# Altium PCB PCB1.PcbDoc
Units mm, origin at the board's own origin, x right, y up, seen from the top; angles counter-clockwise.
Board outline 30.4 x 31.22 mm, 2 copper layers (Top Layer, Bottom Layer); 47 components, 33 nets, 158 pads, 154 vias.
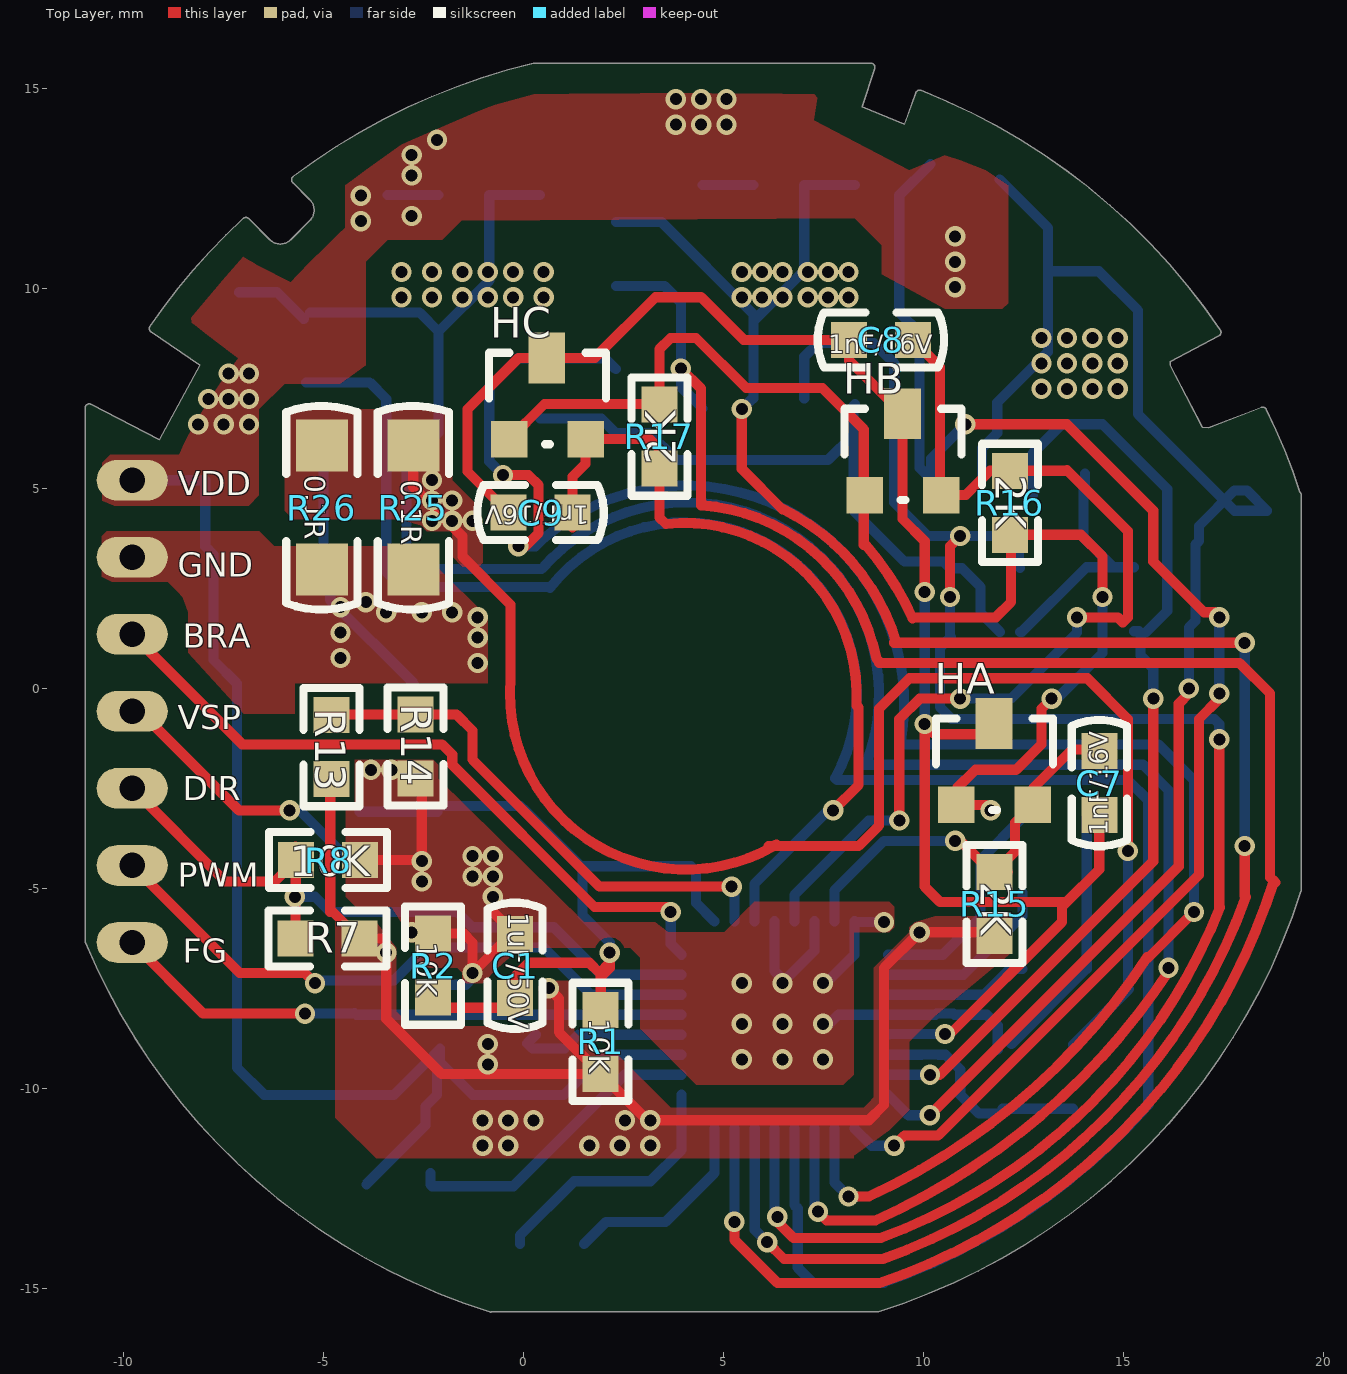
[diagram p0: Top Layer view]
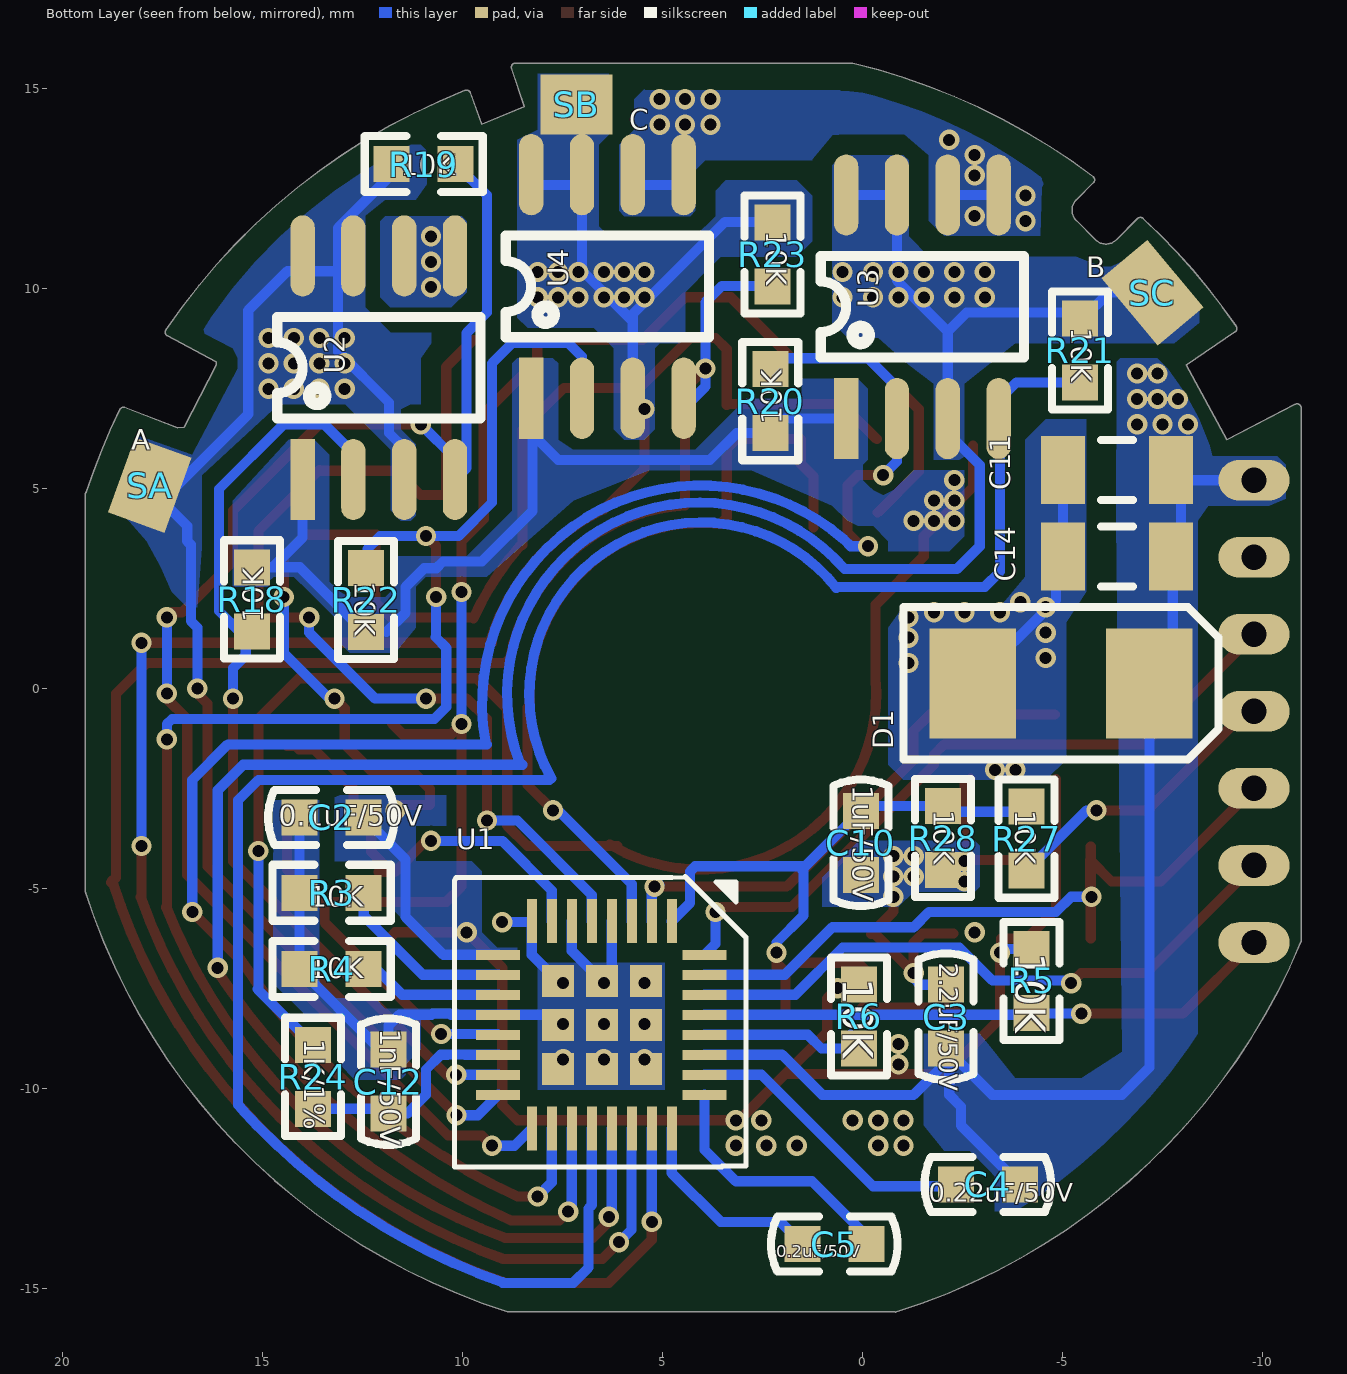
[diagram p1: Bottom Layer view, seen from below]

## Layer stack, top to bottom
Top Solder: solder mask 0.0102, Solder Resist, Dk 3.5
Top Layer: signal copper 0.0356
Dielectric 1: dielectric 0.32, FR-4, Dk 4.8
Bottom Layer: signal copper 0.0356
Bottom Solder: solder mask 0.0102, Solder Resist, Dk 3.5

## Board outline
-10.95,-6.341 cw(c-10.855,-6.302) -10.957,-6.302 -10.957,7.013 cw(c-10.855,7.013) -10.808,7.104 -10.809,7.104 -10.808,7.104 -9.097,6.22 -8.084,8.083 -9.308,8.915 cw(c-9.251,8.999) -9.335,9.057 cw(c4.013,-0.127) -7.007,11.75 cw(c-6.938,11.675) -6.86,11.741 -6.338,11.219 ccw(c-6.41,11.147) -6.338,11.219 ccw(c-6.077,11.479) -5.817,11.219 -5.338,11.698 ccw(c-5.266,11.626) -5.338,11.698 ccw(c-5.598,11.958) -5.23,11.958 ccw(c-5.598,11.958) -5.338,12.218 cw(c-5.266,12.291) -5.338,12.219 -5.338,12.218 -5.765,12.646 cw(c-5.693,12.718) -5.755,12.799 cw(c4.013,-0.127) 0.255,15.633 cw(c0.279,15.534) 0.298,15.634 8.687,15.634 cw(c8.687,15.532) 8.789,15.532 cw(c8.687,15.532) 8.784,15.5 8.47,14.548 9.529,14.106 9.809,14.89 cw(c9.905,14.856) 9.943,14.951 cw(c4.013,-0.127) 17.425,8.964 cw(c17.34,8.906) 17.442,8.906 cw(c17.34,8.906) 17.388,8.816 16.167,8.168 16.167,8.089 16.969,6.535 17.131,6.517 18.447,7.025 cw(c18.484,6.93) 18.576,6.975 cw(c4.013,-0.127) 19.413,4.908 cw(c19.343,4.834) 19.445,4.834 19.445,-5.047 ccw(c19.343,-5.047) 19.445,-5.045 19.445,-5.047 cw(c19.343,-5.047) 19.44,-5.078 cw(c4.013,-0.127) 8.881,-15.58 cw(c8.85,-15.483) 8.85,-15.585 -0.789,-15.585 cw(c-0.814,-15.486) -0.844,-15.584 cw(c4.013,-0.127)

## Design rules (kind name [scope] priority, off if disabled: settings)
Clearance [All] p1: gap=0.127
PolygonConnect [All] p1: connectstyle=Direct reliefconductorwidth=0.254 reliefentries=4 polygonreliefangle="90 Angle" airgapwidth=0.254
RoutingVias [All] p1: holewidth=0.711 width=1.27 viastyle="Through Hole" minholewidth=0.711 minwidth=1.27 maxholewidth=0.711 maxwidth=1.27
SilkToSilkClearance [All] p1: silktosilkclearance=0.051
SolderMaskExpansion [All] p1: expansion=0.102
Width [All] p1: maxlimit=0.254 minlimit=0.254 preferedwidth=0.254
29 further rules are at their usual default settings.

## Components (designator, comment, footprint, x,y, rotation, side; value= is the part's Value field where it differs from the comment)
C1 "1uF/50V" C0603 -3.302,-7.239 r180 top
C2 "0.1uF/50V" C0603 13.589,-0.127 r90 bottom
C3 "2.2uF/50V" C0603 1.016,-8.509 r0 bottom
C4 "0.22uF/50V" C0603 -3.429,-15.494 r270 bottom
C5 "0.2uF/50V" C0603 1.016,-10.795 r90 bottom
C7 "1nF/16V" C0603 11.303,-2.667 r180 top
C8 "1nF/16V" C0603 8.636,11.811 r90 top
C9 "1nF/16V" C0603 0.127,7.493 r90 top
C10 "1uF/50V" C0603 -3.048,-3.556 r180 bottom
C11 "22uF/25V" C1206 -6.35,5.461 r180 bottom
C12 "1nF/50V" C0603 8.763,-9.525 r180 bottom
C14 "22uF/25V" C1206 -6.35,3.302 r180 bottom
D1 "24V/Zener" SMB -4.953,0.127 r180 bottom
HA "HALL_SOT23-3" SOT-23 15.113,-2.54 r0 top locked
HB "HALL_SOT23-3" SOT-23 12.827,5.207 r0 top locked
HC "HALL_SOT23-3" SOT-23 3.937,6.604 r0 top locked
R1 "10K" R0603 0.254,-10.287 r180 top
R2 "10K" R0603 -3.937,-8.382 r180 top
R3 "10K" R0603 14.732,-3.429 r90 bottom
R4 "10K" R0603 14.732,-5.334 r90 bottom
R5 "10K" R0603 -2.54,-8.763 r0 bottom
R6 "10K" R0603 1.778,-9.652 r0 bottom
R7 "" R0603 -6.35,-4.572 r90 top
R8 "10K" R0603 -3.429,-5.969 r270 top
R13 "" R0603 -6.477,-2.921 r180 top
R14 "" R0603 -1.016,0 r0 top
R15 "2K" R0603 13.462,-3.937 r0 top
R16 "2K" R0603 13.843,6.096 r0 top
R17 "2K" R0603 5.08,7.747 r0 top
R18 "10K" R0603 13.589,3.683 r180 bottom
R19 "10K" R0603 9.525,11.43 r270 bottom
R20 "10K" R0603 0.635,8.636 r180 bottom
R21 "10K" R0603 -7.112,9.906 r180 bottom
R22 "10K" R0603 14.097,0.762 r0 bottom
R23 "10K" R0603 3.937,9.398 r0 bottom
R24 "1K/1%" R0603 12.065,-8.255 r180 bottom
R25 "0.1R" R1206 -0.508,4.445 r0 top
R26 "0.1R" R1206 -2.794,4.445 r0 top
R27 "10K" R0603 -2.413,-5.207 r0 bottom
R28 "10K" R0603 -3.683,-2.286 r180 bottom
SA "" cp1#1 23.749,7.239 r20 top
SB "" cp1#2 13.462,14.605 r0 top
SC "" cp1#3 -2.413,5.842 r320 top
U1 "SDC9270_QFN32" "QFN32 (5*5)" 6.604,-3.175 r270 bottom
U2 "MOS" SOP-8 17.907,7.874 r0 bottom
U3 "MOS" SOP-8 4.318,9.398 r0 bottom
U4 "MOS" SOP-8 12.192,9.906 r0 bottom

## Footprints (in the part's own frame and the unit in brackets; to place one, negate y for a bottom-side part, rotate by r counter-clockwise, add the part's x,y. Pads: shape width x height; smd on the part's side, far side on the other; paste and mask are expansions set on the pad)
C0603 [mm]
  rect 0.9x0.9 smd: 1(-3.096,0.496) 2(-3.096,-1.104)
  silkscreen extent -3.78,-1.88 -2.41,1.28
C1206 [mm] "Chip Capacitor, Body 3.2x1.6mm, IPC High Density"
  rect 1.1x1.7 smd: 1(-1.35,0) 2(1.35,0)
  silkscreen extent -0.4,-0.75 0.4,0.75, body extent -1.7,-0.9 1.7,0.9, height 1.3
cp1#1 [mm]
  rect 1.5x2 smd far side: 1(-6.3,0)
cp1#2 [mm]
  rect 1.8x1.5 smd far side: 1(-6.3,0)
cp1#3 [mm]
  rect 1.5x2.2 smd far side: 1(-6.3,0)
"QFN32 (5*5)" [mm]
  rect 1.1x0.25 smd: 1(2.643,1.828) 2(2.643,1.328) 3(2.643,0.828) 4(2.643,0.328) 5(2.643,-0.172) 6(2.643,-0.672) 7(2.643,-1.172) 8(2.643,-1.672) 17(7.823,-1.672) 18(7.823,-1.172) 19(7.823,-0.672) 20(7.823,-0.172) 21(7.823,0.328) 22(7.823,0.828) 23(7.823,1.328) 24(7.823,1.828)
  rect 0.25x1.1 smd: 9(3.483,-2.512) 10(3.983,-2.512) 11(4.483,-2.512) 12(4.983,-2.512) 13(5.483,-2.512) 14(5.983,-2.512) 15(6.483,-2.512) 16(6.983,-2.512) 25(6.983,2.648) 26(6.483,2.648) 27(5.983,2.648) 28(5.483,2.648) 29(4.983,2.648) 30(4.483,2.648) 31(3.983,2.648) 32(3.483,2.648)
  rect 0.8x0.8 smd: 33(4.133,-1.022) 33(4.133,0.078) 33(4.133,1.178) 33(5.233,-1.022) 33(5.233,0.078) 33(5.233,1.178) 33(6.333,-1.022) 33(6.333,0.078) 33(6.333,1.178)
  silkscreen extent 1.52,-3.6 8.79,3.68
R0603 [mm]
  rect 0.9x0.9 smd: 1(-1.679,-0.653) 2(-1.679,-2.253)
  silkscreen extent -2.38,-2.93 -0.98,0.02
R1206 [mm]
  rect 1.3x1.3 smd: 1(-2.244,-1.475) 2(-2.244,1.625)
  silkscreen extent -3.13,-2.47 -1.35,2.62
SMB [mm]
  rect 2.159x2.743 smd: 1(-2.21,0) 2(2.21,0)
  silkscreen extent -3.94,-1.91 3.94,1.91
SOP-8 [mil]
  rect 24x80 smd: 1(-153.56,104.3)
  oval 24x80 smd: 2(-203.56,104.3) 3(-253.56,104.3) 4(-303.56,104.3) 5(-303.56,-115.7) 6(-253.56,-115.7) 7(-203.56,-115.7) 8(-153.56,-115.7)
  silkscreen extent -329,-56 -129,44
SOT-23 [mil]
  rect 36x36 smd: 1(-93.79,-14.61) 3(-168.79,-14.61)
  rect 36x50 smd: 2(-131.79,65.39)
  silkscreen extent -189,-20 -74,70

## Part data
C1 C7 C8 C9 C10 C11 C12 C14: library part C0603, "C0603"
C2 C4 C5: library part C0805, "C0805"
C3: library part C1206, "C1206"
D1: library part Zener_SOD-123, "Zener Diode"
R1 R2 R3 R4 R5 R6 R7 R8 R13 R14 R15 R16 R17 R24 R27 R28: library part R0603, "R0603"
R18 R19 R20 R21 R22 R23: library part R1_0603
R25 R26: library part R2512
SA SB SC: library part CON1, "Connector"

## Free pads (board coordinates)
  oval 1.778x1.016 hole 0.635: 1(-9.779,-6.35) 1(-9.779,-4.424) 1(-9.779,-2.498) 1(-9.779,-0.572) 1(-9.779,1.355) 1(-9.779,3.281) 1(-9.779,5.207)

## Via types
v1: diameter 0.508, hole 0.3, Top Layer to Bottom Layer, 154 vias

## Nets (pads, with @x,y where several pads share a name; then routed paths per layer and width w, separated by ;. In a path a pad name is that pad's centre, name@x,y a point inside that pad or via, vN(x,y) a via of type N, cw(c..) or ccw(c..) an arc to the next point about the centre after c; other vN are vias at no path point)
BRAKE: pad.1@-9.779,1.355 U1.32 | length 17.7
  Top Layer w0.254: pad.1@-9.779,1.355 -7.027,-1.397 -2.032,-1.397 -1.778,-1.651 -1.778,-1.905 1.778,-5.461 3.683,-5.461 v1(3.683,-5.588)
  Bottom Layer w0.254: v1(3.683,-5.588) 3.683,-6.385 U1.32
CP1: C5.1 U1.24 | length 5.1
  Bottom Layer w0.254: C5.1 2.068,-13.335 3.556,-13.335 4.776,-12.115 U1.24
CP2: C5.2 U1.25 | length 6.5
  Bottom Layer w0.254: C5.2 -0.088,-13.677 1.27,-12.319 3.175,-12.319 3.956,-11.538 U1.25
DIR: pad.1@-9.779,-2.498 R7.1 R8.2 U1.31 | length 19
  Top Layer w0.254: pad.1@-9.779,-2.498 -7.451,-4.826 -6.218,-4.826 R8.2@-5.697,-4.305 ; v1(-5.715,-5.207) -5.682,-5.174 R8.2 R8.2@-5.697,-4.305 ; R7.1 R8.2@-5.697,-4.305 ; R8.2@-5.697,-3.955 R8.2@-5.697,-4.305
  Bottom Layer w0.254: v1(-5.715,-5.207) -5.207,-5.207 -4.826,-5.588 -1.651,-5.588 -1.27,-5.969 0.762,-5.969 1.951,-7.158 U1.31
FG: pad.1@-9.779,-6.35 R5.1 U1.29 | length 14.5
  Top Layer w0.254: pad.1@-9.779,-6.35 -8.001,-8.128 v1(-5.461,-8.128)
  Bottom Layer w0.254: v1(-5.461,-8.128) -4.237,-8.128 R5.1 -4.171,-8.158 U1.29
GHA: R19.1 U1.17 U2.4 | length 37.6
  Top Layer w0.254: v1(9.271,-11.43) 9.525,-11.176 10.37,-11.176 16.891,-4.655 16.891,-0.762 17.399,-0.254 v1(17.399,-0.127) ; v1(11.049,6.604) 13.589,6.604 15.748,4.445 15.748,3.175 17.018,1.905 17.272,1.905 v1(17.399,1.778)
  Bottom Layer w0.254: U1.17 8.708,-11.43 v1(9.271,-11.43) ; R19.1 9.398,12.329 9.398,9.398 9.906,8.89 9.906,5.515 U2.4 10.196,5.751 v1(11.049,6.604) ; v1(17.399,-0.127) v1(17.399,1.778)
GHB: R21.2 U1.20 U3.4 | length 53
  Bottom Layer w0.254: R21.2 -3.843,7.653 -3.429,7.239 -3.429,2.921 -3.048,2.54 0.635,2.54 ; 0.664,2.517 cw(c4.039,-0.147) 7.79,-2.249 ; U1.20 6.776,-12.916 6.858,-12.998 6.858,-14.478 7.239,-14.859 9.012,-14.859 ; 7.794,-2.241 7.839,-2.286 15.113,-2.286 15.621,-2.794 15.621,-10.414 ; 9.012,-14.844 ccw(c3.891,-0.081) 15.563,-10.47
GHC: R23.1 U1.23 U4.4 | length 51
  Top Layer w0.254: v1(3.937,8.001) 4.445,7.493 4.445,4.583 ; 4.446,4.582 cw(c4.121,-0.208) 8.826,0.749 8.89,0.685 8.89,0.635 17.907,0.635 18.669,-0.127 18.669,-4.725 18.796,-4.852 ; v1(5.276,-13.335) 5.276,-13.785 6.35,-14.859 8.89,-14.859 ; 8.892,-14.865 ccw(c3.937,-0.127) 18.766,-4.803
  Bottom Layer w0.254: R23.1@2.314,10.066 3.523,10.066 3.937,9.652 v1(3.937,8.001) 3.937,7.547 U4.4@4.481,7.003 ; v1(5.276,-13.335) U1.23
GLA: R18.2 U1.15 U2.2 | length 24
  Top Layer w0.254: v1(10.166,-9.658) 10.408,-9.658 15.748,-4.318 v1(15.748,-0.254)
  Bottom Layer w0.254: U1.15 v1(10.166,-9.658) ; U2.2@12.736,4.844 12.736,5.878 13.462,6.604 14.478,6.604 16.096,4.986 16.096,1.938 R18.2@15.555,1.397 ; R18.2 R18.2@15.395,1.43 ; R18.2@15.428,1.397 15.428,0.828 15.748,0.508 v1(15.748,-0.254)
GLB: R20.1 U1.18 U3.2 | length 47.2
  Top Layer w0.254: v1(-0.508,5.334) 0.127,5.334 0.381,5.08 0.381,3.888 0.049,3.556 v1(-0.127,3.556) ; v1(8.128,-12.7) 8.636,-12.7 ccw(c1.579,2.559) 15.599,-6.719 ; 15.616,-6.736 v1(16.764,-5.588)
  Bottom Layer w0.254: v1(-0.508,5.334) -0.853,5.679 U3.2 -0.853,7.529 -0.127,8.255 2.042,8.255 R20.1 ; v1(-0.127,3.556) 0.303,3.556 0.472,3.724 cw(c4.064,-0.381) 9.437,-1.321 ; U1.18 7.776,-12.348 v1(8.128,-12.7) ; 9.398,-1.397 15.875,-1.397 16.764,-2.286 v1(16.764,-5.588)
GLC: R22.2 U1.21 U4.2 | length 44.7
  Top Layer w0.254: v1(6.35,-13.208) 6.35,-13.335 6.75,-13.735 8.944,-13.735 ccw(c3.937,-0.127) 17.417,-5.468 17.399,-5.45 v1(17.399,-1.27) ; v1(10.668,2.286) 10.668,3.556 v1(10.922,3.81)
  Bottom Layer w0.254: v1@6.276,-13.134 U1.21 ; U4.2 7.021,8.291 7.366,8.636 8.763,8.636 9.271,8.128 9.271,4.649 10.11,3.81 v1(10.922,3.81) 12.065,3.81 12.385,3.49 12.385,3.048 R22.2 ; v1(10.668,2.286) 10.668,1.303 10.684,1.286 10.414,1.016 10.414,-0.464 10.712,-0.762 17.272,-0.762 17.399,-0.889 v1(17.399,-1.27)
GND: 
HA: C9.2 HC.1 R17.2 U1.3 | length 20.5
  Top Layer w0.254: C9.2@1.231,4.025 C9.2 1.231,5.295 1.555,5.619 HC.1 3.165,6.233 3.401,5.997 R17.2 3.401,4.276 3.565,4.112 cw(c4.034,-0.162) 8.326,-0.421 8.382,-0.477 8.382,-2.413 v1(7.747,-3.048)
  Bottom Layer w0.254: U1.3 5.776,-4.887 7.747,-2.916 v1(7.747,-3.048)
HB: C8.2 HB.1 R16.1 U1.5 | length 25.7
  Top Layer w0.254: v1(9.398,-3.302) 9.398,-0.762 9.906,-0.254 v1(10.922,-0.254) ; C8.2 10.414,8.041 HB.1@10.414,4.867 ; HB.1 11.059,4.836 11.666,5.443 R16.1 13.571,5.443 13.589,5.461 15.113,3.937 15.113,1.778 14.986,1.651 14.859,1.778 v1(13.843,1.778)
  Bottom Layer w0.254: U1.5 6.776,-5.162 8.636,-3.302 v1(9.398,-3.302) ; v1@10.922,-0.127 v1(10.922,-0.254) 12.192,-0.254 13.843,1.397 v1(13.843,1.778)
HC: C7.2 HA.1 R15.1 U1.7 | length 10.5
  Top Layer w0.254: v1(10.795,-3.81) 10.922,-3.81 11.702,-4.59 R15.1@12.108,-4.59 ; R15.1 12.291,-4.082 12.291,-3.351 HA.1 12.731,-2.509 13.716,-1.524 14.097,-1.524 14.185,-1.436 C7.2@14.399,-1.436
  Bottom Layer w0.254: U1.7 7.776,-5.051 9.017,-3.81 v1(10.795,-3.81)
ILIMIT: C12.2 R24.2 U1.14 | length 5.5
  Bottom Layer w0.254: U1.14 9.948,-9.158 9.956,-9.15 10.377,-9.15 10.385,-9.158 10.555,-9.158 10.922,-9.525 10.922,-10.16 11.391,-10.629 C12.2 ; C12.2@11.979,-10.508 R24.2
ISENSE: R18.1 R20.2 R22.1 R24.1 R25.2 R26.2 U2.1 U3.1 U4.1 | length 61.1
  Top Layer w0.254: R25.2 -2.752,5.038 -1.524,3.81 -1.524,3.302 -0.319,2.097 -0.319,0.254 ccw(c4.064,-0.127) 6.265,-3.937 ccw(c4.064,-0.127) 6.328,-3.9 ; 6.135,-3.937 8.382,-3.937 8.89,-3.429 8.89,-0.508 9.652,0.254 14.097,0.254 15.113,-0.762 v1(15.113,-4.064)
  Bottom Layer w0.254: U3.1 1.948,6.749 R20.2 3.154,6.383 3.822,5.715 7.62,5.715 U4.1@8.255,6.35 ; U4.1@8.291,7.112 8.255,7.076 U4.1@8.255,6.35 ; 11.91,1.415 11.43,1.895 11.43,2.54 10.965,3.005 10.667,3.005 10.497,3.175 9.525,3.175 8.255,4.445 U4.1@8.255,6.35 ; R22.1 12.464,1.415 14.079,3.03 14.75,3.03 ; R24.1 15.136,-7.516 15.113,-7.493 v1(15.113,-4.064) ; U2.1 14.006,3.774 14.75,3.03 ; U2.1@14.043,4.88 U2.1@14.043,5.37 ; R18.1 14.75,3.03
  other v1: -2.286,4.191 -1.778,4.191 -1.27,4.191 -2.286,4.699 -1.778,4.699 -2.286,5.207
LEAD: R13.2 R14.1 U1.2 | length 13.5
  Top Layer w0.254: R13.2@-4.798,-0.653 R14.1 -1.669,-0.653 -1.27,-1.052 -1.27,-1.778 1.905,-4.953 v1(5.207,-4.953)
  Bottom Layer w0.254: v1(5.207,-4.953) 5.207,-4.87 5.163,-4.826 5.08,-4.909 5.276,-5.105 U1.2
MODE: R3.2 U1.10 | length 4.5
  Bottom Layer w0.254: U1.10 11.003,-7.158 12.479,-5.682 R3.2
NetP1_3: pad.1@-9.779,-0.572 R27.1 | length 7.3
  Top Layer w0.254: pad.1@-9.779,-0.572 -9.588,-0.572 -7.112,-3.048 v1(-5.842,-3.048)
  Bottom Layer w0.254: v1(-5.842,-3.048) -5.598,-3.048 R27.1
NFLT: R6.1 U1.28 | length 4.4
  Bottom Layer w0.254: R6.1@0.313,-8.658 0.099,-8.872 0.226,-8.999 1.034,-8.999 1.375,-8.658 U1.28
PGND: C7.1 C8.1 C9.1 HA.2 HB.2 HC.2 U1.13 | length 43
  Top Layer w0.254: C9.1 -1.397,5.425 -1.397,6.985 -0.117,8.265 HC.2 1.788,8.265 3.302,9.779 4.445,9.779 5.509,8.715 C8.1 8.14,8.208 HB.2 9.479,4.237 10.033,3.683 v1(10.033,2.413) ; v1(10.541,-8.636) 10.668,-8.636 13.462,-5.842 13.462,-5.461 13.589,-5.334 ; HA.2 11.502,-1.143 10.287,-1.143 v1(10.033,-0.889) 10.033,-4.953 10.414,-5.334 13.589,-5.334 ; C7.1@14.399,-3.036 14.399,-4.524 13.589,-5.334
  Bottom Layer w0.254: U1.13 9.138,-8.636 v1(10.541,-8.636) ; v1(10.033,-0.889) v1(10.033,2.413)
PWM: pad.1@-9.779,-4.424 U1.30 | length 15.8
  Top Layer w0.254: pad.1@-9.779,-4.445 -9.779,-4.424 -7.091,-7.112 -5.461,-7.112 v1(-5.207,-7.366)
  Bottom Layer w0.254: v1(-5.207,-7.366) -5.142,-7.301 -3.237,-7.301 -2.413,-6.477 0.508,-6.477 1.689,-7.658 U1.30
PWMIN: 
SA: R19.2 SA.1 U1.16 U2.3 U2.7 U2.8 | length 39.2
  Top Layer w0.254: v1(10.16,-10.668) 16.383,-4.445 16.383,-0.381 16.637,-0.127 v1(16.637,0)
  Bottom Layer w0.254: U1.16 9.626,-10.668 v1(10.16,-10.668) ; U2.3 11.466,6.005 11.847,6.386 11.847,7.148 13.117,8.418 13.117,10.432 ; R19.2@11.905,12.728 13.117,11.516 13.117,10.432 ; v1(16.637,0) 16.637,1.524 16.8,1.687 16.8,3.592 16.891,3.683 16.891,4.064 17.78,4.953 18.084,4.953 18.592,4.445 17.78,4.445 15.367,6.858 15.367,9.452 14.387,10.432 13.117,10.432
  other v1: 12.954,7.493 13.589,7.493 14.224,7.493 14.859,7.493 12.954,8.128 13.589,8.128 14.224,8.128 14.859,8.128 12.954,8.763 13.589,8.763 14.224,8.763 14.859,8.763
SB: R21.1 SC.1 U1.19 U3.3 U3.7 U3.8 | length 59.1
  Top Layer w0.254: v1(7.366,-13.081) 7.587,-13.302 8.798,-13.302 ccw(c1.7,2.497) v1@16.176,-7.012
  Bottom Layer w0.254: SC.1@-7.112,9.906 -6.157,9.906 R21.1@-5.489,9.238 ; R21.1@-5.329,9.398 -2.594,9.398 -2.123,8.926 ; U3.8 U3.7 -0.853,10.196 -2.123,8.926 ; U1.19 7.276,-12.991 v1(7.366,-13.081) ; 8.509,-1.905 15.494,-1.905 16.129,-2.54 v1(16.129,-6.985) ; 8.572,-1.88 ccw(c4.093,-0.152) 0.456,2.983 -2.348,2.983 -2.921,3.556 -2.921,5.588 -2.123,6.386 U3.3 -2.123,8.926
  other v1: -3.048,9.779 -2.286,9.779 -1.524,9.779 -0.889,9.779 -0.254,9.779 0.508,9.779 -3.048,10.414 -2.286,10.414 -1.524,10.414 -0.889,10.414 -0.254,10.414 0.508,10.414
SC: R23.2 SB.1 U1.22 U4.3 U4.7 U4.8 | length 54
  Top Layer w0.254: v1(5.461,6.985) 5.461,5.492 6.48,4.473 ; v1(6.096,-13.843) 6.516,-14.263 8.985,-14.263 ccw(c3.937,-0.127) 18.058,-5.216 18.034,-5.191 v1(18.034,-3.937) ; 6.488,4.482 cw(c4.1,-0.422) 9.326,1.143 ; 9.271,1.143 v1(18.034,1.143)
  Bottom Layer w0.254: R23.2@2.314,11.666 3.447,11.666 5.751,9.362 5.751,9.18 ; v1(5.461,6.985) 5.733,7.257 U4.3 5.751,9.18 ; U1.22 5.784,-11.006 5.784,-13.531 v1(6.096,-13.843) ; U4.8@8.291,12.591 7.021,12.591 7.021,10.45 5.751,9.18 ; v1(18.034,-3.937) v1(18.034,1.143)
  other v1: 5.461,9.779 5.969,9.779 6.477,9.779 7.112,9.779 7.62,9.779 8.128,9.779 5.461,10.414 5.969,10.414 6.477,10.414 7.112,10.414 7.62,10.414 8.128,10.414
SGND: C1.2 C2.1 C3.2 C10.2 C11.1 C12.1 C14.1 D1.1 pad.1@-9.779,3.281 R2.2 R3.1 R4.1 R8.1 R14.2 R25.1 R26.1 R28.2 U1.4 U1.6 U1.8 U1.12 U1.33 | length 33
  Top Layer w0.254: R8.1 -2.568,-4.29 v1(-2.54,-4.318) -2.54,-2.408 R14.2 ; R2.2 -1.491,-6.129 -1.27,-6.35 v1(-1.27,-7.112) -0.293,-6.135 C1.2 -0.762,-5.58 v1(-0.762,-5.207)
  Bottom Layer w0.254: C11.1 C14.1 -4.826,3.128 -4.826,2.21 D1.1 ; C3.2 -1.436,-7.405 -1.27,-7.239 v1(-1.27,-7.112) ; U1.4 6.276,-7.058 6.526,-7.308 7.276,-6.558 U1.6 ; U1.33@7.626,-8.408 7.876,-8.158 U1.12 10.3,-8.158 10.331,-8.128 10.751,-8.128 10.782,-8.158 11.587,-8.158 11.859,-8.43 C12.1 ; U1.33@7.626,-7.308 8.276,-6.658 U1.8 8.3,-5.842 v1(9.017,-5.842) ; C12.1@12.09,-8.788 12.1,-8.788 12.202,-8.89 R4.1 ; R4.1@14.085,-7.007 C2.1
  other v1: 5.461,-9.271 6.477,-9.271 7.493,-9.271 5.461,-8.382 6.477,-8.382 7.493,-8.382 5.461,-7.366 6.477,-7.366 7.493,-7.366 -2.794,-6.096 -2.54,-4.826 -1.27,-4.699 -0.762,-4.699 -1.27,-4.191 -0.762,-4.191 -3.81,-2.032 -3.302,-2.032 -1.143,0.635 -4.572,0.762 -1.143,1.27 -4.572,1.397 -1.143,1.778 -3.429,1.905 -2.54,1.905 -1.778,1.905 -4.572,2.032 -3.937,2.159
SREF: C1.1 C10.1 R1.2 R2.1 R27.2 R28.1 U1.1 | length 20.3
  Top Layer w0.254: R2.1@-2.385,-7.983 C1.1@0.018,-7.983 ; C1.1 -0.206,-7.191 0.127,-6.858 1.651,-6.858 1.905,-7.112 2.159,-6.858 v1(2.159,-6.604) 2.159,-6.985 1.933,-7.211 R1.2
  Bottom Layer w0.254: R27.2@-4.092,-3.081 R28.1@-2.146,-3.081 ; R28.1 -0.073,-2.939 C10.1 1.524,-4.536 ; v1(2.159,-6.604) 2.159,-6.35 1.48,-5.671 1.48,-4.445 4.191,-4.445 4.318,-4.572 4.318,-5.36 U1.1
TEST: R4.2 U1.11 | length 3.6
  Bottom Layer w0.254: U1.11 11.519,-7.658 12.164,-7.013 R4.2
VCP: C4.2 U1.26 | length 7.7
  Bottom Layer w0.254: C4.2@-2.325,-12.113 C4.2 -2.278,-12.446 -0.254,-12.446 2.534,-9.658 U1.26
VDD: C3.1 C4.1 C11.2 C14.2 D1.2 pad.1@-9.779,5.207 U1.27 U2.5 U2.6 U3.5 U3.6 U4.5 U4.6 | length 36.4
  Bottom Layer w0.254: pad.1@-9.779,5.207 -7.954,5.207 -7.954,3.556 -7.747,3.349 -7.747,0.711 D1.2 -7.163,-9.474 -6.477,-10.16 -3.234,-10.16 C3.1@-2.159,-9.085 ; C4.1 -2.449,-10.922 -2.449,-10.45 -2.159,-10.16 C3.1@-2.159,-9.085 ; U3.5 U3.6 ; U1.27 2.018,-9.158 1.016,-10.16 -1.27,-10.16 -2.08,-9.35 C3.1 C3.1@-2.159,-9.085 ; U4.5@4.481,12.591 U4.6@5.751,12.591
  other v1: -8.128,6.604 -7.493,6.604 -6.858,6.604 -7.874,7.239 -7.366,7.239 -6.858,7.239 -7.366,7.874 -6.858,7.874 10.795,10.033 10.795,10.668 10.795,11.303 -4.064,11.684 -2.794,11.811 -4.064,12.319 -2.794,12.827 -2.794,13.335 -2.159,13.716 3.81,14.097 4.445,14.097 5.08,14.097 3.81,14.732 4.445,14.732 5.08,14.732
VREF: C2.2 HA.3 HB.3 HC.3 R1.1 R5.2 R6.2 R7.2 R13.1 R15.2 R16.2 R17.1 U1.9 | length 69.3
  Top Layer w0.254: R13.1@-4.826,-2.268 -4.826,-5.588 -4.76,-5.588 R7.2 -3.457,-6.251 -3.457,-6.576 v1(-3.429,-6.604) -3.429,-8.255 -2.05,-9.634 R1.1 ; HC.3 0.529,7.112 R17.1@3.401,7.112 ; v1(0.635,-7.493) 0.889,-7.747 0.889,-8.59 R1.1 ; R17.1 R17.1@3.401,7.112 ; 8.509,3.584 8.509,6.477 7.475,7.511 5.57,7.511 4.318,8.763 3.683,8.763 3.401,8.481 R17.1@3.401,7.112 ; 8.562,3.584 cw(c2.794,-1.397) 9.732,1.757 ; 9.732,1.778 11.811,1.778 12.192,2.159 12.192,3.815 R16.2 13.937,3.843 14.478,3.302 v1(14.478,2.286) ; v1(11.684,-3.048) 11.547,-2.911 HA.3 10.826,-2.509 11.303,-2.032 12.319,-2.032 12.954,-1.397 12.954,-0.508 v1(13.208,-0.254) ; R15.2 11.689,-6.096 v1(9.906,-6.096) 9.017,-6.985 9.017,-10.414 8.636,-10.795 3.094,-10.795 R1.1
  Bottom Layer w0.254: R5.2 -3.523,-6.51 v1(-3.429,-6.604) ; U1.9 10.487,-6.658 11.43,-5.715 11.43,-4.278 C2.2 ; v1(13.208,-0.254) 13.335,-0.254 14.478,0.889 v1(14.478,2.286)
  other v1: -1.016,-11.43 -0.381,-11.43 1.651,-11.43 2.413,-11.43 3.175,-11.43 -1.016,-10.795 -0.381,-10.795 0.254,-10.795 2.54,-10.795 3.175,-10.795 -0.889,-9.398 -0.889,-8.89

## Polygon pours and split planes (outlines as drawn)
ISENSE on Bottom Layer "ISENSE" (solid, remove dead copper, pour order 56): -2.413,5.461 -2.54,5.461 -2.54,3.81 -2.159,3.429 -0.635,3.429 -0.635,3.683 -0.254,4.064 0.127,4.064 0.381,4.191 0.762,4.572 2.794,5.461 2.921,5.461 5.334,5.461 7.239,4.699 7.366,4.699 7.239,4.699 9.398,2.794 9.779,2.794 10.668,2.794 10.922,2.794 11.176,2.54 11.176,1.524 11.684,0.889 12.827,0.889 12.954,1.016 13.081,1.143 13.208,1.27 13.208,1.651 13.208,1.778 13.97,2.54 14.097,2.667 14.224,2.794 14.478,2.794 14.732,2.794 14.859,2.667 14.859,2.54 15.748,2.54 15.748,2.667 15.748,3.556 15.748,4.699 14.351,6.223 13.716,6.223 13.335,5.842 13.335,3.429 13.335,2.667 13.208,2.54 13.081,2.413 12.827,2.286 11.938,2.286 11.684,2.54 11.684,3.302 10.668,3.302 10.414,3.302 10.16,3.302 9.906,3.302 8.763,4.445 8.763,8.128 8.636,8.255 7.747,8.255 7.493,8.001 7.62,8.128 7.62,6.223 7.239,5.969 4.191,5.969 3.302,6.858 2.921,7.239 1.524,7.239 1.524,7.493 1.524,7.747 0.127,7.747 -0.127,7.493 -0.127,7.366 -0.127,7.239 -0.127,5.715 0,5.588 0,5.461 0,5.207 -0.127,5.08 -0.254,4.953 -0.508,4.826 -0.762,4.953 -1.27,5.461 -2.54,5.461
SA on Bottom Layer "VDD" (solid, remove dead copper, pour order 54): 10.898,12.606 11.176,12.218 11.684,12.218 11.938,12.218 12.44,11.817 12.44,9.779 12.44,9.525 11.808,8.893 10.795,8.893 10.795,8.636 11.05,8.255 11.05,7.104 11.304,7.104 11.547,6.975 11.547,6.742 11.547,6.477 11.176,6.106 11.176,4.318 11.304,4.19 11.547,4.19 11.808,4.451 11.808,5.969 12.18,6.341 12.944,7.105 14.605,7.105 16.533,5.334 16.533,4.064 16.533,3.516 16.64,2.029 16.891,2.029 17.275,2.413 17.551,3.046 17.908,3.683 18.675,4.572 18.675,4.064 18.675,4.829 18.161,6.341 16.764,5.842 15.623,7.997 15.623,8.255 15.75,8.506 16.004,8.636 16.533,8.907 ccw(c5.448,1.791) 11.304,13.59 11.05,13.59 10.898,13.438
VDD on Bottom Layer "VDD" (solid, remove dead copper, pour order 52): 0.564,14.951 0.514,13.849 0.756,13.849 1.27,13.229 1.27,13.208 1.397,13.208 3.937,13.208 4.064,13.081 4.191,12.954 4.191,11.938 4.318,11.811 4.445,11.811 5.969,11.811 6.096,11.938 6.096,12.065 6.096,13.589 5.715,13.97 5.715,14.732 5.461,14.986 5.429,14.954
VDD on Bottom Layer "VDD" (solid, remove dead copper, pour order 50): -4.475,12.528 cw(c-4.344,12.621) -4.475,12.713 cw(c-4.393,12.727) -4.434,12.799 cw(c3.082,2.609) 0,14.89 cw(c0.567,11.653) 0.903,14.923 0.762,13.859 -1.032,13.859 -1.649,13.335 -1.649,11.698 -2.032,11.314 -4.434,11.314
SGND on Bottom Layer "SGND" (solid, remove dead copper, pour order 30): -4.064,6.223 -4.064,2.794 -3.429,2.045 -2.159,2.045 -1.016,2.045 -0.635,1.524 -0.635,-1.905 -1.016,-2.286 -2.667,-2.286 -3.429,-2.286 -4.445,-2.286 -4.572,-2.286 -5.086,-1.778 -5.086,1.657 -5.588,2.413 -5.588,2.54 -5.588,6.731 -4.572,6.731
VREF on Bottom Layer "VREF" (solid, remove dead copper, pour order 24): 8.636,-6.731 9.525,-6.731 9.652,-6.731 9.779,-6.604 10.668,-6.604 11.557,-5.715 11.811,-5.461 11.811,-4.572 11.811,-4.318 13.208,-4.318 13.208,-2.54 13.081,-2.667 11.684,-2.667 10.414,-2.667 10.414,-3.429 11.176,-3.429 11.176,-4.318 10.414,-4.318 9.779,-4.318 9.652,-4.445 11.303,-4.445 10.668,-4.445 10.541,-4.572 10.668,-4.445 9.652,-4.445 9.525,-4.572 9.525,-5.08 9.525,-6.096 9.398,-6.223 9.144,-6.477 8.636,-6.477
SGND on Bottom Layer "SGND" (solid, remove dead copper, pour order 22): 0.106,-3.81 0.751,-4.456 1.016,-4.72 1.016,-5.207 1.016,-5.334 1.016,-5.461 -0.635,-5.461 -0.889,-5.461 -1.27,-5.08 -2.794,-5.08 -2.921,-4.953 -2.921,-3.937 -2.794,-3.81
SGND on Bottom Layer "SGND" (solid, remove dead copper, pour order 20): 8.076,-6.858 8.128,-6.91 8.128,-10.033 4.953,-10.033 4.953,-6.858 6.477,-6.858 8.076,-6.858 8.128,-6.806
SB on Bottom Layer "SB" (solid, remove dead copper, pour order 8): 0.508,13.335 0.762,13.081 0.762,9.271 0.762,9.144 0.381,8.763 -0.381,8.763 -1.143,8.089 -1.778,7.62 -1.778,7.874 -1.778,5.715 -2.54,5.715 -2.54,8.001 -2.54,7.62 -3.81,8.636 -5.755,8.636 -8.084,8.636 -7.783,8.636 -8.412,9.144 -8.412,9.5 -6.987,10.924 -6.609,10.795 -6.987,10.924 -6.191,10.541 -6.096,10.541 -5.969,10.541 -5.334,10.795 -4.699,10.795 -4.318,10.795 -4.191,10.795 -1.651,10.795 -1.143,11.303 -1.143,11.43 -1.143,13.208 -1.016,13.335
SC on Bottom Layer "SC" (solid, remove dead copper, pour order 6): 8.128,15.367 8.128,14.106 8.128,13.97 8.636,13.716 8.636,9.271 8.382,9.017 6.731,9.017 6.223,8.509 6.223,6.477 5.969,6.223 5.461,6.223 5.207,6.477 5.207,8.509 5.08,8.636 4.572,8.636 4.445,8.763 4.445,9.906 4.318,10.033 3.937,10.414 3.556,10.795 1.651,10.795 1.27,11.176 1.27,12.319 1.651,12.7 3.429,12.7 3.683,12.446 3.683,11.811 4.191,11.303 4.572,11.303 6.35,11.303 6.477,11.43 6.604,11.557 6.604,11.684 6.604,13.589 6.35,13.843 6.35,15.367
VDD on Bottom Layer "VDD" (solid, remove dead copper, pour order 34): 12.065,11.684 12.065,11.439 12.065,9.779 11.811,9.525 10.287,9.525 9.906,9.906 9.906,11.811 9.906,12.065 9.906,11.684 10.033,11.811 10.287,11.811 10.668,11.811 11.938,11.811
SGND on Bottom Layer "SGND" (solid, remove dead copper, pour order 35): 14.351,-2.794 14.735,-2.794 14.735,-7.366 13.846,-8.255 13.208,-8.255 13.081,-8.382 13.081,-9.398 12.7,-9.779 11.557,-9.779 11.43,-9.652 11.43,-9.398 11.303,-9.271 11.049,-9.017 11.049,-8.255 11.049,-8.382 10.922,-8.255 10.16,-8.255 10.033,-8.255 10.033,-8.001 10.414,-8.001 10.795,-8.001 11.303,-8.001 11.938,-8.001 12.192,-7.747 13.208,-7.747 13.589,-7.366 13.589,-3.302 13.589,-2.794
VDD on Bottom Layer "VDD" (solid, remove dead copper, pour order 44): -8.372,-8.636 ccw(c4.172,-0.305) -3.81,-13.074 -3.299,-13.074 -3.299,-12.189 -3.157,-12.047 -2.921,-11.811 -2.667,-11.557 -2.54,-11.557 -2.032,-11.557 -1.524,-10.922 -1.524,-8.636 -2.921,-8.636 -3.81,-9.742 -5.461,-9.742 -6.483,-9.087 -6.338,4.191 -6.338,5.969 -8.681,5.969 -8.681,5.804 -10.363,5.804 -10.572,5.594 -10.572,4.744 -10.16,4.572 -8.636,4.572 -8.372,4.191
VDD on Bottom Layer "VDD" (solid, remove dead copper, pour order 46): -8.763,5.715 -6.223,5.842 -6.223,5.945 -6.35,5.818 -6.35,8.255 -7.366,8.255 ccw(c-3.098,4.253)
VREF on Top Layer "VREF" (solid, remove dead copper, pour order 26): -3.683,-5.842 -3.175,-6.477 -3.175,-7.175 -3.175,-8.064 -2.794,-8.445 0.381,-8.445 0.381,-7.556 0.635,-7.302 1.27,-7.302 1.27,-8.572 1.397,-8.7 1.778,-9.08 2.032,-9.08 2.286,-9.08 3.683,-10.477 3.937,-10.477 8.509,-10.477 8.636,-10.351 8.763,-10.223 8.763,-9.716 8.763,-6.985 9.525,-6.223 9.652,-6.096 9.652,-5.969 9.779,-5.842 10.287,-5.696 12.192,-5.696 12.192,-6.604 10.287,-8.191 10.541,-7.938 10.033,-8.445 9.652,-8.826 9.652,-11.239 9.652,-10.541 9.144,-11.049 8.255,-11.684 8.255,-11.747 -3.683,-11.747 -4.572,-10.858 -4.699,-10.731 -4.699,-5.842
SGND on Top Layer "SGND" (solid, remove dead copper, pour order 18): -1.46,-1.778 -2.413,-1.778 -2.254,-1.778 -2.127,-1.905 -2.127,-2.254 1.524,-5.842 3.302,-5.842 3.619,-6.096 5.016,-6.096 5.779,-5.334 9.144,-5.334 9.271,-5.461 9.277,-5.963 9.144,-6.096 8.255,-6.096 8.255,-9.652 8.001,-9.906 4.318,-9.906 2.917,-8.505 2.917,-6.727 2.667,-6.477 2.095,-6.477 -0.063,-6.477 -0.635,-6.985 -0.889,-7.239 -1.016,-7.366 -1.524,-7.366 -1.524,-7.112 -1.651,-6.985 -2.095,-6.985 -2.667,-6.985 -2.667,-6.341 -2.93,-6.341 -3.048,-6.223 -3.048,-5.842 -3.302,-5.461 -3.683,-5.461 -4.191,-5.461 -4.445,-5.207 -4.445,-3.81 -4.445,-2.921 -4.254,-2.794 -4.254,-1.778 -3.302,-1.778 -3.175,-1.778 -3.048,-1.778 -3.111,-1.778
SGND on Top Layer "SGND" (solid, remove dead copper, pour order 16): -10.412,3.935 -10.541,3.806 -10.541,2.794 -10.287,2.667 -8.89,2.667 -8.636,2.413 -8.509,2.286 -8.382,1.905 -8.382,1.27 -8.382,0.889 -6.985,-0.635 -5.716,-0.635 -5.716,0.127 -0.889,0.127 -0.888,1.652 -0.889,1.778 -2.159,3.048 -2.159,3.556 -3.556,3.556 -4.191,3.556 -4.191,6.35 -4.191,3.556 -6.227,3.556 -6.606,3.935 -8.509,3.935
ISENSE on Top Layer "ISENSE" (solid, remove dead copper, pour order 36): -5.842,6.985 -5.969,6.858 -5.969,5.334 -5.969,4.445 -5.755,4.231 -3.088,4.231 -2.539,4.065 -2.412,3.937 -1.778,3.937 -1.778,3.303 -1.523,3.048 -1.016,3.048 -1.016,3.937 -1.143,4.572 -1.778,5.207 -1.784,6.731 -1.714,6.731 -1.968,6.985
VDD on Top Layer "VDD" (solid, remove dead copper, pour order 48): -8.608,5.841 -10.325,5.841 -10.526,5.64 -10.526,4.688 -10.225,4.564 -6.86,4.564 -6.614,4.834 -6.614,6.975 -5.969,7.62 -4.572,7.62 -3.938,8.083 -3.938,10.667 -3.386,11.219 -2.032,11.219 -1.553,11.698 8.282,11.75 8.956,11.076 8.956,10.353 10.541,9.49 11.973,9.49 12.118,9.636 12.118,12.582 11.557,12.954 10.922,13.208 10.541,13.335 9.652,12.954 7.258,14.205 7.366,14.86 ccw(c3.811,-386.047) 0.255,14.86 ccw(c17.111,-46.724) -0.844,14.548 ccw(c28.094,-54.931) -3.048,13.589 ccw(c27.706,-30.83) -4.454,12.582 ccw(c30.199,12.04) -4.454,11.521 ccw(c37.743,-32.039) -5.817,10.158 ccw(c-28.696,-34.595) -6.626,10.563 ccw(c-18.194,-7.993) -7.007,10.795 ccw(c42.575,-32.532) -8.357,9.2 ccw(c22.673,48.42) -7.123,8.255 ccw(c2.917,0.416) -8.255,6.535 ccw(c-4.162,4.016)

## Silkscreen, mask and mechanical layers (free items; w line width, h text height)
Top Overlay:
  text "VDD" at -8.636,4.826 h0.6
  text "GND" at -8.636,2.794 h0.6
  text "BRA" at -8.509,1.016 h0.6
  text "VSP" at -8.636,-1.016 h0.6
  text "DIR" at -8.509,-2.794 h0.6
  text "PWM" at -8.636,-4.953 h0.6
  text "FG" at -8.509,-6.858 h0.6
Bottom Overlay:
  text "C" at 5.842,13.97 h0.51
  text "B" at -5.588,10.287 h0.51
  text "A" at 18.288,5.969 h0.51
Mechanical 1:
  circle w0.203: c4.013,-0.127 r3.9
  lines w0.203: -0.814,-15.486 cw(c4.013,-0.127) -10.855,-6.302 -10.855,7.013 -9.055,6.083 -7.95,8.115 -9.251,8.999 cw(c4.013,-0.127) -6.938,11.675 -6.41,11.147 ccw(c-6.077,11.479) -5.745,11.147 -5.266,11.626 ccw(c-5.598,11.958) -5.266,12.291 -5.693,12.718 cw(c4.013,-0.127) 0.279,15.534 ; -0.814,-15.483 8.85,-15.483 ccw(c4.013,-0.127) 19.343,-5.047 19.343,4.834 ; 0.281,15.532 8.687,15.532 8.344,14.491 9.588,13.97 9.905,14.856 cw(c4.013,-0.127) 17.34,8.906 16.066,8.23 16.066,8.064 16.904,6.439 17.145,6.413 18.484,6.93 cw(c4.013,-0.127) 19.323,4.854 ; 2.692,-15.448 2.692,-14.732 cw(c3.162,-14.732) 3.162,-14.262 4.737,-14.262 cw(c4.737,-14.668) 5.143,-14.668 5.143,-15.41 ccw(c5.182,-15.41) 5.182,-15.448 ; 19.3,1.887 cw(c18.986,2.68) 19.343,3.454
Mechanical 15:
  lines w0.254: 0.717,6.779 cw(c3.937,-0.127) 3.937,7.493